# EAGLE board MainBoard (EAGLE 9.6.2)
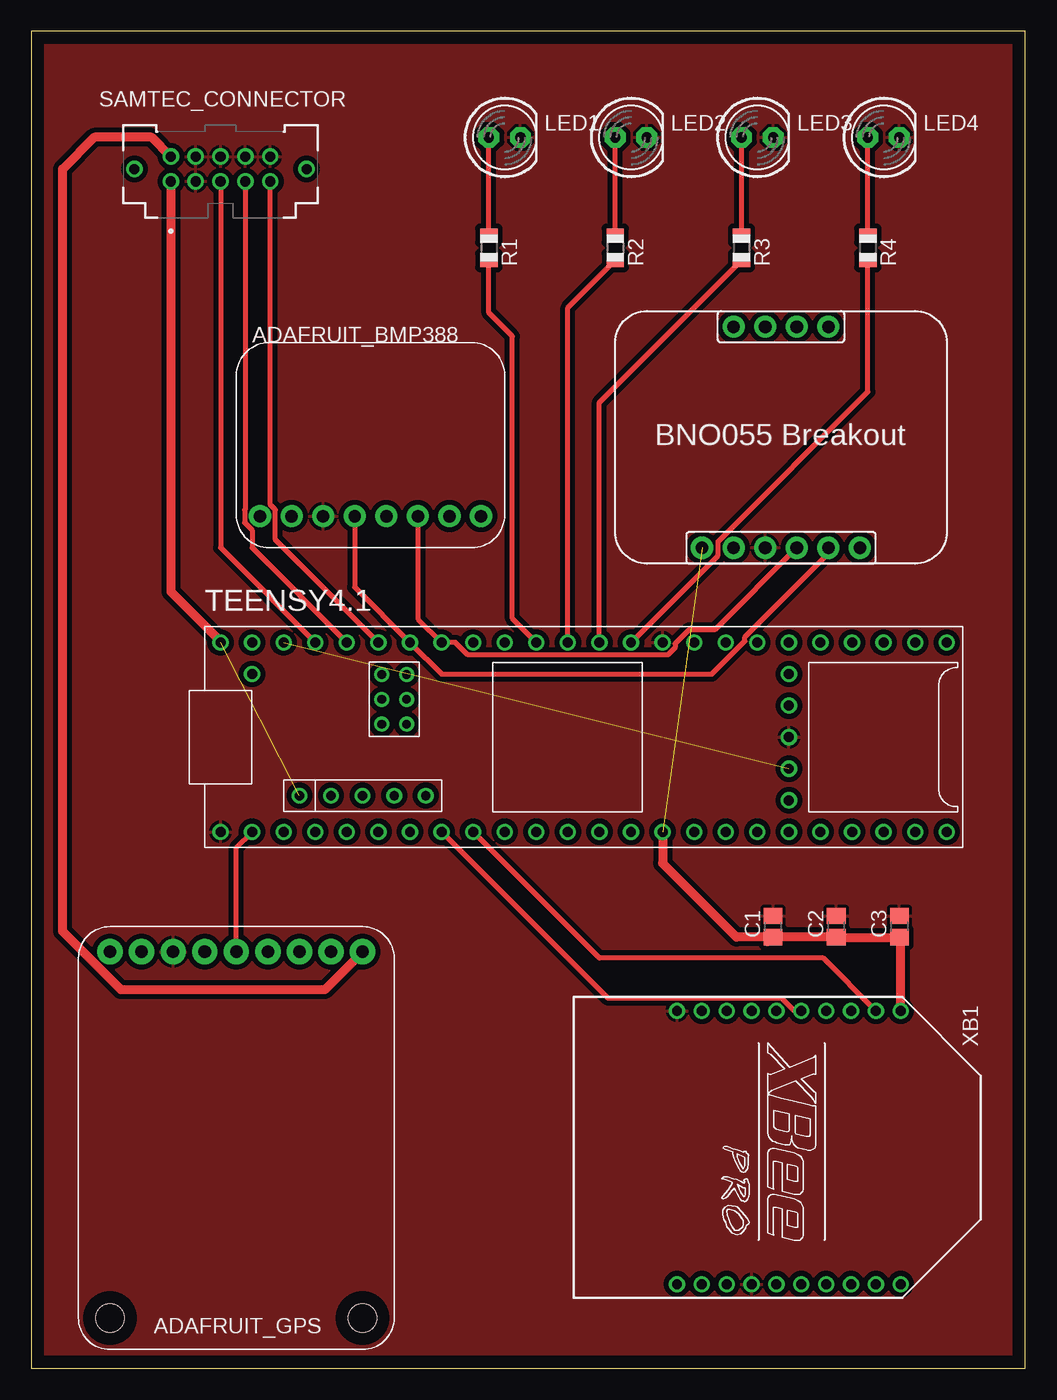
[diagram p0: board, top side]
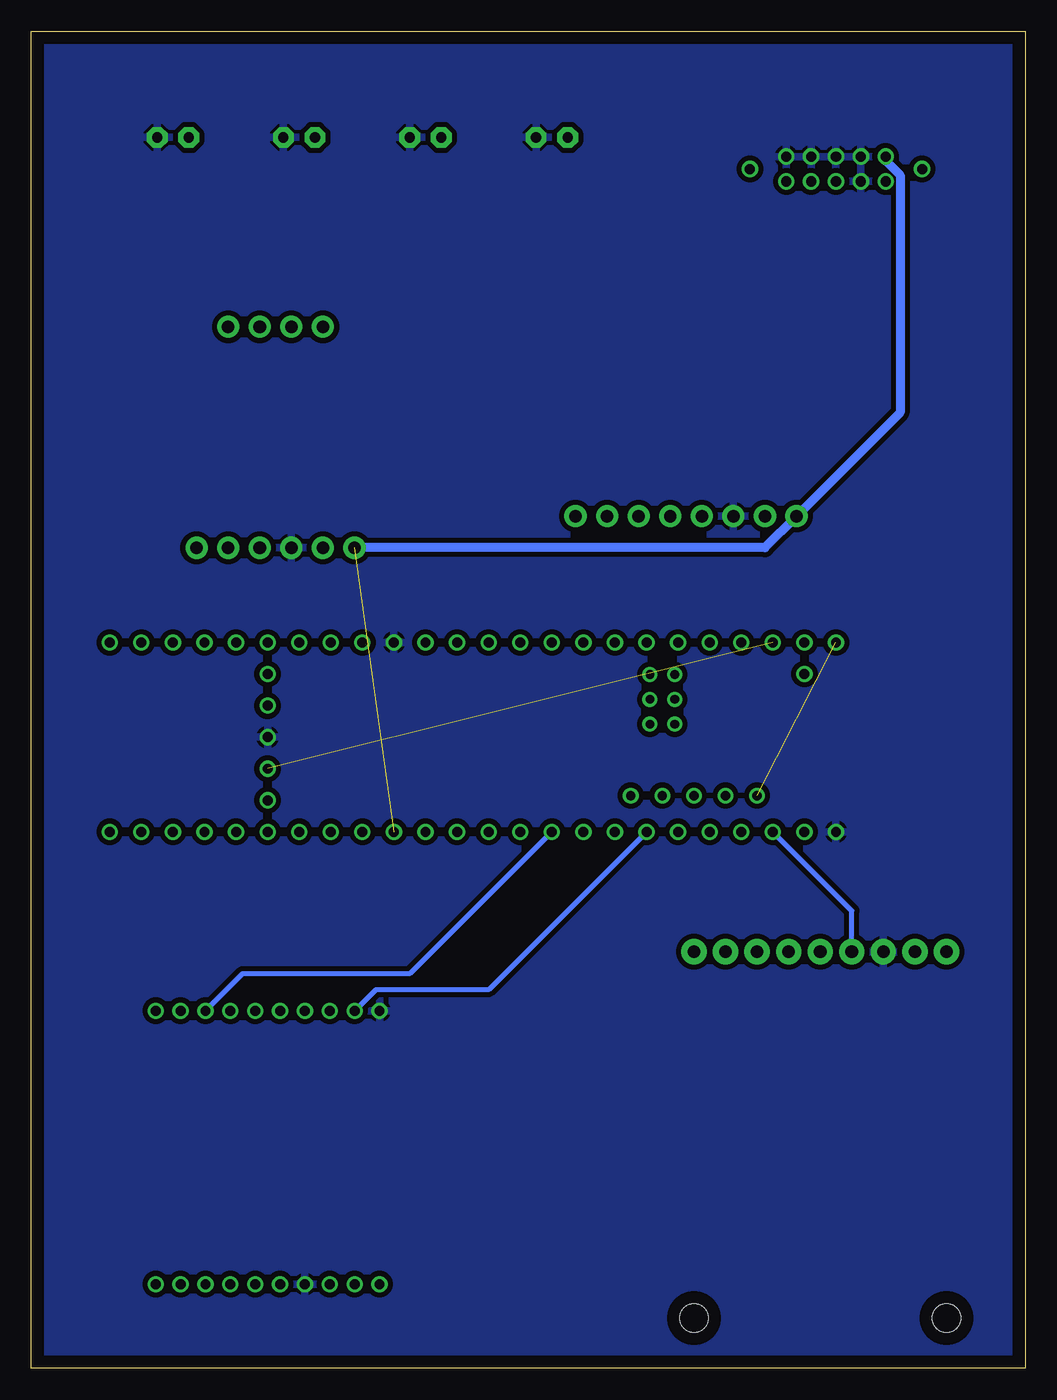
[diagram p1: board, bottom side, seen from below]

Size 79.99 x 107.62 mm. Coordinates in mm from the lower left corner, seen from the top.
Outline: 0,0 79.99,0 79.99,107.62 0,107.62 0,0
Copper layers (1*16): Top 0.035mm / dielectric 1.5mm / Bottom 0.035mm
Design rules "default": minimum track width 6mil, minimum drill 0.35mm, track to track 6mil, track to pad 6mil, pad to pad 6mil, via to via 6mil, smd to smd 6mil, copper to edge 40mil, drill to drill 6mil, minimum pad ring 10mil, minimum via ring 8mil, stop-mask expansion 4mil, vias tented up to drill 0mil, thermal gap 10mil

## Footprints (pad centres in the part's own frame; a part is rotated, then mirrored left to right if it is on the bottom)
ADAFRUITBMP388 = drill 1 pad 1.778: 3VO 4.445,2.54; CS 17.145,2.54; GND 6.985,2.54; INT 19.685,2.54; SCK 9.525,2.54; SDI 14.605,2.54; SDO 12.065,2.54; VIN 1.905,2.54
AFT_GPS = drill 1.016 pad 2.032: 3V3 2.54,2.032; EN 5.08,2.032; FIX 10.16,2.032; GND 17.78,2.032; PPS 22.86,2.032; RX 15.24,2.032; TX 12.7,2.032; VBAT 7.62,2.032; VIN 20.32,2.032 | hole 2.286: 2.54,31.496; 22.86,31.496
C0805 = smd 1.3 x 1.5: 1 -0.85,0; 2 0.85,0
LED5MM = drill 0.813 pad 1.676 octagon: A -1.27,0; K 1.27,0
R0805 = smd 1.1 x 1.4: 1 -1,0; 2 1,0
SAMTEC_T2M-105-01-X-D-TH-WT = drill 0.813 pad 1.163: 01 -4,-1; 02 -4,1; 03 -2,-1; 04 -2,1; 05 0,-1; 06 0,1; 07 2,-1; 08 2,1; 09 4,-1; 10 4,1; S1 -6.925,0; S2 6.925,0
DEV-16771 = drill 0.8: 3.3V 6.35,-7.62; 3.3V@1 -24.13,7.62; 3.3V@2 16.51,-2.54; AGND -26.67,7.62; D0 -26.67,-7.62; D1 -24.13,-7.62; D2 -21.59,-7.62; D3 -19.05,-7.62; D4 -16.51,-7.62; D5 -13.97,-7.62; D6 -11.43,-7.62; D7 -8.89,-7.62; D8 -6.35,-7.62; D9 -3.81,-7.62; D10 -1.27,-7.62; D11 1.27,-7.62; D12 3.81,-7.62; D13/LED 3.81,7.62; D14/A0 1.27,7.62; D15/A1 -1.27,7.62; D16/A2 -3.81,7.62; D17/A3 -6.35,7.62; D18/A4 -8.89,7.62; D19/A5 -11.43,7.62; D20/A6 -13.97,7.62; D21/A7 -16.51,7.62; D22/A8 -19.05,7.62; D23/A9 -21.59,7.62; D24/A10 8.89,-7.62; D25/A11 11.43,-7.62; D26/A12 13.97,-7.62; D27/A13 16.51,-7.62; D28 19.05,-7.62; D29 21.59,-7.62; D30 24.13,-7.62; D31 26.67,-7.62; D32 29.21,-7.62; D33 29.21,7.62; D34 26.67,7.62; D35 24.13,7.62; D36 21.59,7.62; D37 19.05,7.62; D38/A14 16.51,7.62; D39/A15 13.97,7.62; D40/A16 11.43,7.62; D41/A17 8.89,7.62; GND -29.21,-7.62; GND@1 6.35,7.62; GND@2 16.51,0; ON/OFF 16.51,5.08; PROGRAM 16.51,2.54; VBAT 16.51,-5.08; VIN -29.21,7.62; VUSB -26.67,5.08 | drill 0.75: 5V -22.86,-4.7; D+ -17.78,-4.7; D- -20.32,-4.7; USB_GND -15.24,-4.7; USB_GND@2 -12.7,-4.7 | drill 0.7: G -14.24,3.04; LED -16.24,3.04; R+ -16.24,5.04; R- -14.24,5.04; T+ -14.24,1.04; T- -16.24,1.04
BNO055_BREAKOUT = drill 1.016 pad 1.778: 3VOUT 9.525,1.27; ADDR 17.145,19.05; GND 12.065,1.27; INT 14.605,19.05; PS0 9.525,19.05; PS1 12.065,19.05; RST 19.685,1.27; SCL 17.145,1.27; SDA 14.605,1.27; VIN 6.985,1.27
XBEE-PRO = drill 0.8 pad 1.27: 1 -11,9; 2 -11,7; 3 -11,5; 4 -11,3; 5 -11,1; 6 -11,-1; 7 -11,-3; 8 -11,-5; 9 -11,-7; 10 -11,-9; 11 11,-9; 12 11,-7; 13 11,-5; 14 11,-3; 15 11,-1; 16 11,1; 17 11,3; 18 11,5; 19 11,7; 20 11,9

## Placement (x,y rotation side)
ADAFRUIT_BMP388  ADAFRUITBMP388  [ADAFRUITBMP388]  16.51,66.04 0 top
ADAFRUIT_GPS  AFT_GPS  [AFT_GPS]  29.21,35.56 180 top
C1  10uF  [C0805]  59.69,35.56 90 top
C2  1.0uF  [C0805]  64.77,35.56 90 top
C3  8.2pF  [C0805]  69.85,35.56 90 top
LED1  [LED5MM]  38.1,99.06 0 top
LED2  [LED5MM]  48.26,99.06 0 top
LED3  [LED5MM]  58.42,99.06 0 top
LED4  [LED5MM]  68.58,99.06 0 top
R1  [R0805]  36.83,90.17 270 top
R2  [R0805]  46.99,90.17 270 top
R3  [R0805]  57.15,90.17 270 top
R4  [R0805]  67.31,90.17 270 top
SAMTEC_CONNECTOR  T2M-105-01-X-D-TH-WT  [SAMTEC_T2M-105-01-X-D-TH-WT]  15.24,96.52 0 top
TEENSY4.1  DEV-16771  [DEV-16771]  44.45,50.8 0 top
U$1  IMU_BREAKOUT  [BNO055_BREAKOUT]  46.99,64.77 0 top
XB1  XBEE-PRO  [XBEE-PRO]  60.96,17.78 270 top

## Library data of the parts
ADAFRUIT_BMP388 = adafruit BMP388
ADAFRUIT_GPS = adafruit_Ultimate_GPS_Breakout
C1-C3 LED1-LED4 R1-R4 U$1 = adafruit(seeIMUBreakout)
SAMTEC_CONNECTOR = T2M-105-01-X-D-TH-WT; MANUFACTURER: Samtec; MAXIMUM_PACKAGE_HEIGHT: 6.55mm; PARTREV: AH; STANDARD: Manufacturer Recommendations
TEENSY4.1 = DEV-16771(Teensy 4.1); AVAILABILITY: Warning; DESCRIPTION: RT1062 Teensy 4.1 i.MX ARM® Cortex®-M7 MPU Embedded Evaluation Board; MF: SparkFun Electronics; MP: DEV-16771; PACKAGE: None; PRICE: None; PURCHASE-URL: https://pricing.snapeda.com/search/part/DEV-16771/?ref=eda
XB1 = xbee; MPN: XBP24-AWI-001; OC_FARNELL: 1337916; OC_NEWARK: 42M2667

## Nets
3.3V: TEENSY4.1.3.3V@1 TEENSY4.1.3.3V@2
3V3: ADAFRUIT_BMP388.VIN ADAFRUIT_GPS.3V3 C1.1 C2.1 C3.1 SAMTEC_CONNECTOR.02 TEENSY4.1.3.3V U$1.VIN XB1.1
5V: SAMTEC_CONNECTOR.01 TEENSY4.1.5V TEENSY4.1.VIN
AGND: TEENSY4.1.AGND
BATT_TEMP: SAMTEC_CONNECTOR.05 TEENSY4.1.D23/A9
G: TEENSY4.1.G
GND: ADAFRUIT_BMP388.GND ADAFRUIT_GPS.GND C1.2 C2.2 C3.2 LED1.K LED2.K LED3.K LED4.K SAMTEC_CONNECTOR.03 SAMTEC_CONNECTOR.04 SAMTEC_CONNECTOR.06 SAMTEC_CONNECTOR.08 SAMTEC_CONNECTOR.10 TEENSY4.1.GND TEENSY4.1.GND@1 TEENSY4.1.GND@2 U$1.GND XB1.10 XB1.14
GPS_RX: ADAFRUIT_GPS.RX TEENSY4.1.D1
GPS_TX: ADAFRUIT_GPS.TX TEENSY4.1.D0
I_SENSE: SAMTEC_CONNECTOR.09 TEENSY4.1.D21/A7
LED_1: R1.2 TEENSY4.1.D16/A2
LED_2: R2.2 TEENSY4.1.D15/A1
LED_3: R3.2 TEENSY4.1.D14/A0
LED_4: R4.2 TEENSY4.1.D13/LED
N$8: LED1.A R1.1
N$9: LED2.A R2.1
N$10: LED3.A R3.1
N$11: LED4.A R4.1
SCL: ADAFRUIT_BMP388.SCK TEENSY4.1.D20/A6 U$1.SCL
SDA: ADAFRUIT_BMP388.SDI TEENSY4.1.D19/A5 U$1.SDA
USB_GND1: TEENSY4.1.USB_GND
USB_GND2: TEENSY4.1.USB_GND@2
V_BATT: SAMTEC_CONNECTOR.07 TEENSY4.1.D22/A8
VBAT: TEENSY4.1.VBAT
VUSB: TEENSY4.1.VUSB
XBEE_EN: TEENSY4.1.D5 XB1.9
XBEE_RST: TEENSY4.1.D6 XB1.5
XBEE_RX: TEENSY4.1.D8 XB1.3
XBEE_TX: TEENSY4.1.D7 XB1.2

## Tracks (layer width: path | path; a pad name or v marks a point on that pad's centre or on a via)
3.3V  (1 unrouted)
3V3  (1 unrouted)
  Top 0.152: C2.1 64.61,34.64 64.48,34.58
  Top 0.61: 59.27,34.29 C1.1 59.27,34.71 | XB1.1 69.85,28.89
  Top 0.711: XB1.1 69.96,34.6 C3.1 69.78,34.64 64.61,34.64 | C2.1 C1.1 56.73,34.71 50.8,40.64 TEENSY4.1.3.3V | SAMTEC_CONNECTOR.02 9.7,99.06 5.08,99.06 2.54,96.52 2.54,35.18 7.24,30.48 23.62,30.48 ADAFRUIT_GPS.3V3
  Bottom 0.711: SAMTEC_CONNECTOR.02 11.24,97.17 10.07,96 10.07,76.92 ADAFRUIT_BMP388.VIN 20.95,66.04 U$1.VIN
5V  (1 unrouted)
  Top 0.711: SAMTEC_CONNECTOR.01 11.24,62.5 15.24,58.5 TEENSY4.1.VIN
BATT_TEMP
  Top 0.406: TEENSY4.1.D23/A9 15.24,66.04 SAMTEC_CONNECTOR.05
GND
  pour Bottom (isolate 0.406): 0,107.95 0,0 80.01,0 80.01,107.95
  pour Top (isolate 0.406): 0,107.95 80.01,107.95 80.01,0 0,0
GPS_RX
  Bottom 0.406: ADAFRUIT_GPS.RX 13.97,36.83 TEENSY4.1.D1
GPS_TX
  Top 0.406: ADAFRUIT_GPS.TX 16.51,41.91 TEENSY4.1.D0
I_SENSE
  Top 0.406: SAMTEC_CONNECTOR.09 19.24,69.52 19.66,69.1 19.66,66.7 TEENSY4.1.D21/A7
LED_1
  Top 0.406: R1.2 36.83,84.94 38.71,83.07 38.71,60.35 TEENSY4.1.D16/A2
LED_2
  Top 0.406: TEENSY4.1.D15/A1 43.18,85.36 R2.2
LED_3
  Top 0.406: TEENSY4.1.D14/A0 45.72,77.74 R3.2
LED_4
  Top 0.406: TEENSY4.1.D13/LED 55.27,65.43 55.27,66.56 67.31,78.59 R4.2
N$8
  Top 0.406: R1.1 LED1.A
N$9
  Top 0.406: R2.1 LED2.A
N$10
  Top 0.406: R3.1 LED3.A
N$11
  Top 0.406: R4.1 LED4.A
SCL
  Top 0.406: ADAFRUIT_BMP388.SCK 26.04,62.87 TEENSY4.1.D20/A6 33.02,55.88 54.77,55.88 57.41,58.52 57.41,58.84 64.14,65.56 U$1.SCL
SDA
  Top 0.406: ADAFRUIT_BMP388.SDI 31.11,60.33 TEENSY4.1.D19/A5 34.13,58.42 35.14,57.41 51.22,57.41 51.81,58 51.81,58.32 52.92,59.43 54.98,59.43 U$1.SDA
V_BATT
  Top 0.406: SAMTEC_CONNECTOR.07 17.24,69.17 17.17,69.1 17.17,68.06 17.78,67.45 17.78,66.04 TEENSY4.1.D22/A8
XBEE_EN
  Bottom 0.406: TEENSY4.1.D5 43.18,30.48 52.26,30.48 XB1.9
XBEE_RST
  Top 0.406: XB1.5 61.39,28.78 60.38,29.79 46.41,29.79 TEENSY4.1.D6
XBEE_RX
  Bottom 0.406: TEENSY4.1.D8 49.53,31.75 62.99,31.75 XB1.3
XBEE_TX
  Top 0.406: TEENSY4.1.D7 45.72,33.02 63.72,33.02 XB1.2